# EAGLE board CT_schematic (EAGLE 7.6.0)

Size 100 x 80 mm. Coordinates in mm from the lower left corner, seen from the top.
Outline: 0,0 100,0 100,80 0,80 0,0
Copper layers (1*16): Top 0.035mm / dielectric 1.5mm / Bottom 0.035mm
Design rules "default": minimum track width 10mil, minimum drill 24mil, track to track 8mil, track to pad 8mil, pad to pad 8mil, via to via 8mil, smd to smd 8mil, copper to edge 40mil, drill to drill 8mil, minimum pad ring 10mil, minimum via ring 8mil, stop-mask expansion 4mil, vias tented up to drill 0mil, thermal gap 10mil

## Footprints (pad centres in the part's own frame; a part is rotated, then mirrored left to right if it is on the bottom)
C0603 = smd 0.8 x 0.8: 1 -0.762,0; 2 0.762,0
C0402 = smd 0.5 x 0.5: 1 -0.508,0; 2 0.508,0
C1210 = smd 1.2 x 2.5: 1 -1.524,0; 2 1.524,0
C0805 = smd 1.2 x 1.3: 1 -1.016,0; 2 1.016,0
2220 = smd 1.85 x 5.5: 1 -2.55,0; 2 2.55,0
R0603 = smd 0.8 x 0.8: 1 -0.762,0; 2 0.762,0
EXV-9H = smd 3.505 x 1.676: 1 -2.857,0; 2 2.857,0
L0603 = smd 0.8 x 0.8: 1 -0.762,0; 2 0.762,0
DR1040 = smd 1.6 x 3.2: 1 -4.458,0; 2 4.458,0
PJ-037B_PACKAGE = drill 3.7 square: 1 12,0 | drill 3.2 square: 2 6,0
TFBGA216 = smd 0.4 x 0.4: A1 -5.6,5.6; A2 -4.8,5.6; A3 -4,5.6; A4 -3.2,5.6; A5 -2.4,5.6; A6 -1.6,5.6; A7 -0.8,5.6; A8 0,5.6; A9 0.8,5.6; A10 1.6,5.6; A11 2.4,5.6; A12 3.2,5.6; A13 4,5.6; A14 4.8,5.6; A15 5.6,5.6; B1 -5.6,4.8; B2 -4.8,4.8; B3 -4,4.8; B4 -3.2,4.8; B5 -2.4,4.8; B6 -1.6,4.8; B7 -0.8,4.8; B8 0,4.8; B9 0.8,4.8; B10 1.6,4.8; B11 2.4,4.8; B12 3.2,4.8; B13 4,4.8; B14 4.8,4.8; B15 5.6,4.8; C1 -5.6,4; C2 -4.8,4; C3 -4,4; C4 -3.2,4; C5 -2.4,4; C6 -1.6,4; C7 -0.8,4; C8 0,4; C9 0.8,4; C10 1.6,4; C11 2.4,4; C12 3.2,4; C13 4,4; C14 4.8,4; C15 5.6,4; D1 -5.6,3.2; D2 -4.8,3.2; D3 -4,3.2; D4 -3.2,3.2; D5 -2.4,3.2; D6 -1.6,3.2; D7 -0.8,3.2; D8 0,3.2; D9 0.8,3.2; D10 1.6,3.2; D11 2.4,3.2; D12 3.2,3.2; D13 4,3.2; D14 4.8,3.2; D15 5.6,3.2; E1 -5.6,2.4; E2 -4.8,2.4; E3 -4,2.4; E4 -3.2,2.4; E5 -2.4,2.4; E6 -1.6,2.4; E7 -0.8,2.4; E8 0,2.4; E9 0.8,2.4; E10 1.6,2.4; E11 2.4,2.4; E12 3.2,2.4; E13 4,2.4; E14 4.8,2.4; E15 5.6,2.4; F1 -5.6,1.6; F2 -4.8,1.6; F3 -4,1.6; F4 -3.2,1.6; F5 -2.4,1.6; F6 -1.6,1.6; F7 -0.8,1.6; F8 0,1.6; F9 0.8,1.6; F10 1.6,1.6; F11 2.4,1.6; F12 3.2,1.6; F13 4,1.6; F14 4.8,1.6; F15 5.6,1.6; G1 -5.6,0.8; G2 -4.8,0.8; G3 -4,0.8; G4 -3.2,0.8; G5 -2.4,0.8; G6 -1.6,0.8; G10 1.6,0.8; G11 2.4,0.8; G12 3.2,0.8; G13 4,0.8; G14 4.8,0.8; G15 5.6,0.8; H1 -5.6,0; H2 -4.8,0; H3 -4,0; H4 -3.2,0; H5 -2.4,0; H6 -1.6,0; H10 1.6,0; H11 2.4,0; H12 3.2,0; H13 4,0; H14 4.8,0; H15 5.6,0; J1 -5.6,-0.8; J2 -4.8,-0.8; J3 -4,-0.8; J4 -3.2,-0.8; J5 -2.4,-0.8; J6 -1.6,-0.8; J10 1.6,-0.8; J11 2.4,-0.8; J12 3.2,-0.8; J13 4,-0.8; J14 4.8,-0.8; J15 5.6,-0.8; K1 -5.6,-1.6; K2 -4.8,-1.6; K3 -4,-1.6; K4 -3.2,-1.6; K5 -2.4,-1.6; K6 -1.6,-1.6; K7 -0.8,-1.6; K8 0,-1.6; K9 0.8,-1.6; K10 1.6,-1.6; K11 2.4,-1.6; K12 3.2,-1.6; K13 4,-1.6; K14 4.8,-1.6; K15 5.6,-1.6; L1 -5.6,-2.4; L2 -4.8,-2.4; L3 -4,-2.4; L4 -3.2,-2.4; L5 -2.4,-2.4; L6 -1.6,-2.4; L7 -0.8,-2.4; L8 0,-2.4; L9 0.8,-2.4; L10 1.6,-2.4; L11 2.4,-2.4; L12 3.2,-2.4; L13 4,-2.4; L14 4.8,-2.4; L15 5.6,-2.4; M1 -5.6,-3.2; M2 -4.8,-3.2; M3 -4,-3.2; M4 -3.2,-3.2; M5 -2.4,-3.2; M6 -1.6,-3.2; M7 -0.8,-3.2; M8 0,-3.2; M9 0.8,-3.2; M10 1.6,-3.2; M11 2.4,-3.2; M12 3.2,-3.2; M13 4,-3.2; M14 4.8,-3.2; M15 5.6,-3.2; N1 -5.6,-4; N2 -4.8,-4; N3 -4,-4; N4 -3.2,-4; N5 -2.4,-4; N6 -1.6,-4; N7 -0.8,-4; N8 0,-4; N9 0.8,-4; N10 1.6,-4; N11 2.4,-4; N12 3.2,-4; N13 4,-4; N14 4.8,-4; N15 5.6,-4; P1 -5.6,-4.8; P2 -4.8,-4.8; P3 -4,-4.8; P4 -3.2,-4.8; P5 -2.4,-4.8; P6 -1.6,-4.8; P7 -0.8,-4.8; P8 0,-4.8; P9 0.8,-4.8; P10 1.6,-4.8; P11 2.4,-4.8; P12 3.2,-4.8; P13 4,-4.8; P14 4.8,-4.8; P15 5.6,-4.8; R1 -5.6,-5.6; R2 -4.8,-5.6; R3 -4,-5.6; R4 -3.2,-5.6; R5 -2.4,-5.6; R6 -1.6,-5.6; R7 -0.8,-5.6; R8 0,-5.6; R9 0.8,-5.6; R10 1.6,-5.6; R11 2.4,-5.6; R12 3.2,-5.6; R13 4,-5.6; R14 4.8,-5.6; R15 5.6,-5.6
SOT-23-6 = smd 1.1 x 0.6: 1 -1.4,0.95; 2 -1.4,0; 3 -1.4,-0.95; 4 1.4,-0.95; 5 1.4,0; 6 1.4,0.95
SOIC-8 = smd 1.6 x 0.6: 1 -2.7,1.905 | smd 1.55 x 0.6: 2 -2.7,0.635; 3 -2.7,-0.635; 4 -2.7,-1.905; 5 2.7,-1.905; 6 2.7,-0.635; 7 2.7,0.635; 8 2.7,1.905
SAMTEC_FTSH-105-01-L-DV-K = smd 0.762 x 2.794: 1 -2.54,-2.032; 2 -2.54,2.032; 3 -1.27,-2.032; 4 -1.27,2.032; 5 0,-2.032; 6 0,2.032; 7 1.27,-2.032; 8 1.27,2.032; 9 2.54,-2.032; 10 2.54,2.032
182-009-MALE = drill 1.194 pad 1.524 octagon: 1 -5.537,10.923; 2 -2.769,10.923; 3 0,10.923; 4 2.769,10.923; 5 5.537,10.923; 6 -4.153,8.08; 7 -1.384,8.08; 8 1.384,8.08; 9 4.153,8.08 | hole 3.048: -12.446,9.501; 12.446,9.501
MICRO_USB_AB = smd 0.4 x 1.35: 1 1.3,0.26; 2 0.65,0.26; 3 0,0.26; 4 -0.65,0.26; 5 -1.3,0.26 | drill 0.6 pad 0.95 long: 6 4.175,-2.54; 7 -4.175,-2.54 | drill 0.7 pad 1.1 long: 8 -2.225,0.46; 9 2.225,0.46
SOT143B = smd 1 x 0.7: 1 -0.75,-1 | smd 0.6 x 0.7: 2 0.95,-1; 3 0.95,1; 4 -0.95,1
USB-A-H = drill 0.914: 1 2.718,3.493; 2 2.718,1.003; 3 2.718,-1.003; 4 2.718,-3.493 | drill 2.311: 5 0,-6.566; 6 0,6.566
ABS07-32.768KHZ-7-T = smd 1.1 x 2.4: 1 -2.5,0; 2 0,0
ASFL1 = smd 1.7 x 1.5: 1 -1.27,-1.1; 2 1.27,-1.1; 3 1.27,1.1; 4 -1.27,1.1
WSON-8 = smd 0.3 x 0.6: 1 -0.75,0; 2 0.05,0; 3 0.85,0; 4 1.65,0; 5 1.65,3.8; 6 0.85,3.8; 7 0.05,3.8; 8 -0.75,3.8 | smd 3 x 2.6: PAD 0.45,1.9
QFN-16_EP = smd 0.805 x 0.3: 1 -1.452,0.75; 2 -1.452,0.25; 3 -1.452,-0.25; 4 -1.452,-0.75; 9 1.452,-0.75; 10 1.452,-0.25; 11 1.452,0.25; 12 1.452,0.75 | smd 0.3 x 0.805: 5 -0.75,-1.452; 6 -0.25,-1.452; 7 0.25,-1.452; 8 0.75,-1.452; 13 0.75,1.452; 14 0.25,1.452; 15 -0.25,1.452; 16 -0.75,1.452 | smd 1.55 x 1.55: 17 0,0
QFN-38_UHF = smd 0.75 x 0.3: 1 -2.4,2.75; 2 -2.4,2.25; 3 -2.4,1.75; 4 -2.4,1.25; 6 -2.4,0.25; 7 -2.4,-0.25; 8 -2.4,-0.75; 9 -2.4,-1.25; 10 -2.4,-1.75; 11 -2.4,-2.25; 12 -2.4,-2.75; 20 2.4,-2.75; 21 2.4,-2.25; 22 2.4,-1.75; 23 2.4,-1.25; 24 2.4,-0.75; 25 2.4,-0.25; 26 2.4,0.25; 27 2.4,0.75; 28 2.4,1.25; 29 2.4,1.75; 30 2.4,2.25; 31 2.4,2.75 | smd 0.758 x 0.3: 5 -2.4,0.75 | smd 0.3 x 0.75: 13 -1.5,-3.4; 14 -1,-3.4; 15 -0.5,-3.4; 16 0,-3.4; 17 0.5,-3.4; 18 1,-3.4; 19 1.5,-3.4; 32 1.5,3.4; 33 1,3.4; 34 0.5,3.4; 35 0,3.4; 36 -0.5,3.4; 37 -1,3.4; 38 -1.5,3.4 | smd 3.2 x 5.2: 39 0,0
IRF8306MTRPBF = smd 0.9 x 1.85: 1 0,0; 2 0,-2.35; 6 6.4,0; 7 6.4,-2.35 | smd 0.75 x 0.75: 3 1.75,-1.175 | smd 1.45 x 0.87: 4 3.5,-0.565; 5 3.5,-1.785
SW_4-1437565-2 = smd 1.4 x 2.1: 1 -2.23,4.55; 2 -2.23,-4.55; 3 2.23,4.55; 4 2.23,-4.55
LGM67K-G1J2-24-Z = smd 0.8 x 1.4: A -2,0; C 0,0
NC7SZ125M5X = smd 1.3 x 0.7: 1 -1.3,0.95; 2 -1.3,0; 3 -1.3,-0.95; 4 1.3,-0.95; 5 1.3,0.95

## Placement (x,y rotation side)
C1  1e-06  [C0603]  -92.71,80.01 0 top  (outside the outline)
C2  1e-07  [C0603]  -15.24,85.09 0 top  (outside the outline)
C3  1e-07  [C0603]  -19.05,85.09 0 top  (outside the outline)
C4  1e-07  [C0603]  -22.86,85.09 0 top  (outside the outline)
C5  1e-07  [C0603]  -26.67,85.09 0 top  (outside the outline)
C6  1e-07  [C0603]  -30.48,85.09 0 top  (outside the outline)
C7  1e-07  [C0603]  -34.29,85.09 0 top  (outside the outline)
C8  1e-07  [C0603]  -38.1,85.09 0 top  (outside the outline)
C9  1e-07  [C0603]  -41.91,85.09 0 top  (outside the outline)
C10  1e-07  [C0603]  -45.72,85.09 0 top  (outside the outline)
C11  1e-07  [C0603]  -49.53,85.09 0 top  (outside the outline)
C12  1e-07  [C0603]  -53.34,85.09 0 top  (outside the outline)
C13  1e-07  [C0603]  -57.15,85.09 0 top  (outside the outline)
C14  1e-07  [C0603]  -60.96,85.09 0 top  (outside the outline)
C15  1e-07  [C0603]  -64.77,85.09 0 top  (outside the outline)
C16  1e-07  [C0603]  -68.58,85.09 0 top  (outside the outline)
C17  1e-07  [C0603]  -72.39,85.09 0 top  (outside the outline)
C18  1e-07  [C0603]  -76.2,85.09 0 top  (outside the outline)
C19  1e-07  [C0603]  -80.01,85.09 0 top  (outside the outline)
C20  1e-07  [C0603]  -83.82,85.09 0 top  (outside the outline)
C21  1e-07  [C0603]  -87.63,85.09 0 top  (outside the outline)
C22  4.7e-06  [C0603]  -85.09,80.01 0 top  (outside the outline)
C23  1e-08  [C0603]  -91.44,85.09 0 top  (outside the outline)
C24  1e-06  [C0603]  -15.24,90.17 0 top  (outside the outline)
C25  1e-07  [C0603]  -19.05,90.17 0 top  (outside the outline)
C26  1e-07  [C0603]  -22.86,90.17 0 top  (outside the outline)
C27  1e-07  [C0603]  -26.67,90.17 0 top  (outside the outline)
C28  1e-11  [C0402]  -87.63,90.17 0 top  (outside the outline)
C29  1e-11  [C0402]  -91.44,90.17 0 top  (outside the outline)
C30  1e-08  [C0402]  -15.24,95.25 0 top  (outside the outline)
C31  1e-07  [C0402]  -19.05,95.25 0 top  (outside the outline)
C32  1e-07  [C0402]  -22.86,95.25 0 top  (outside the outline)
C33  1e-08  [C0402]  -26.67,95.25 0 top  (outside the outline)
C34  1e-08  [C0402]  -30.48,95.25 0 top  (outside the outline)
C35  1e-05  [C1210]  -80.01,62.23 0 top  (outside the outline)
C36  1e-05  [C0805]  -50.8,68.58 0 top  (outside the outline)
C37  1e-08  [C0402]  -34.29,95.25 0 top  (outside the outline)
C38  1e-05  [C1210]  -86.36,62.23 0 top  (outside the outline)
C39  1e-05  [C1210]  -16.51,69.85 0 top  (outside the outline)
C40  1e-05  [C0805]  -55.88,68.58 0 top  (outside the outline)
C41  1e-06  [C0603]  -30.48,90.17 0 top  (outside the outline)
C42  1e-07  [C0402]  -38.1,95.25 0 top  (outside the outline)
C43  6.8e-05  [2220]  -88.9,41.91 0 top  (outside the outline)
C44  1e-08  [C0402]  -41.91,95.25 0 top  (outside the outline)
C45  1e-05  [C1210]  -22.86,69.85 0 top  (outside the outline)
C46  1e-05  [C0805]  -60.96,68.58 0 top  (outside the outline)
C47  1e-07  [C0402]  -45.72,95.25 0 top  (outside the outline)
C48  2.2e-06  [C0603]  -88.9,80.01 0 top  (outside the outline)
C49  2.45e-08  [R0603]  -40.64,74.93 0 top  (outside the outline)
C50  2.8258362168397e-09  [R0603]  -71.12,68.58 0 top  (outside the outline)
C51  7.105e-09  [R0603]  -83.82,68.58 0 top  (outside the outline)
C52  0.0001  [EXV-9H]  -26.67,62.23 0 top  (outside the outline)
C53  0.0001  [EXV-9H]  -38.1,62.23 0 top  (outside the outline)
C54  1e-08  [C0402]  -49.53,95.25 0 top  (outside the outline)
C55  1e-08  [C0402]  -53.34,95.25 0 top  (outside the outline)
F1  240.0  [L0603]  -34.29,90.17 0 top  (outside the outline)
I1  7e-06  [DR1040]  -19.05,43.18 0 top  (outside the outline)
J1  PJ-037B  [PJ-037B_PACKAGE]  -57.15,29.21 0 top  (outside the outline)
R2  1000.0  [R0603]  -38.1,90.17 0 top  (outside the outline)
R7  4700.0  [R0603]  -41.91,90.17 0 top  (outside the outline)
R8  47000.0  [R0603]  -45.72,74.93 0 top  (outside the outline)
R9  47000.0  [R0603]  -50.8,74.93 0 top  (outside the outline)
R10  10000.0  [R0603]  -55.88,74.93 0 top  (outside the outline)
R11  10000.0  [R0603]  -60.96,74.93 0 top  (outside the outline)
R12  10000.0  [R0603]  -66.04,74.93 0 top  (outside the outline)
R13  10000.0  [R0603]  -71.12,74.93 0 top  (outside the outline)
R14  10000.0  [R0603]  -76.2,74.93 0 top  (outside the outline)
R15  10000.0  [R0603]  -81.28,74.93 0 top  (outside the outline)
R16  1270.0  [R0603]  -45.72,90.17 0 top  (outside the outline)
R17  10000.0  [R0603]  -86.36,74.93 0 top  (outside the outline)
R18  10000.0  [R0603]  -91.44,74.93 0 top  (outside the outline)
R19  10000.0  [R0603]  -15.24,80.01 0 top  (outside the outline)
R20  10000.0  [R0603]  -20.32,80.01 0 top  (outside the outline)
R21  10000.0  [R0603]  -25.4,80.01 0 top  (outside the outline)
R22  10000.0  [R0603]  -30.48,80.01 0 top  (outside the outline)
R23  5.0  [R0603]  -49.53,90.17 0 top  (outside the outline)
R24  120.0  [R0603]  -53.34,90.17 0 top  (outside the outline)
R25  470000.0  [R0603]  -88.9,68.58 0 top  (outside the outline)
R26  100000.0  [R0603]  -15.24,74.93 0 top  (outside the outline)
R27  200.0  [R0603]  -57.15,90.17 0 top  (outside the outline)
R28  1000.0  [R0603]  -60.96,90.17 0 top  (outside the outline)
R29  100000.0  [R0603]  -20.32,74.93 0 top  (outside the outline)
R30  2231.0  [R0603]  -64.77,90.17 0 top  (outside the outline)
R31  1000.0  [R0603]  -68.58,90.17 0 top  (outside the outline)
R32  20000.0  [R0603]  -35.56,80.01 0 top  (outside the outline)
R33  150000.0  [R0603]  -25.4,74.93 0 top  (outside the outline)
R34  300000.0  [R0603]  -30.48,74.93 0 top  (outside the outline)
R35  100000.0  [R0603]  -35.56,74.93 0 top  (outside the outline)
R36  200.0  [R0603]  -72.39,90.17 0 top  (outside the outline)
R37  1000.0  [R0603]  -76.2,90.17 0 top  (outside the outline)
R38  10000.0  [R0603]  -40.64,80.01 0 top  (outside the outline)
R39  75000.0  [R0603]  -45.72,80.01 0 top  (outside the outline)
R40  10000.0  [R0603]  -50.8,80.01 0 top  (outside the outline)
R41  10000.0  [R0603]  -55.88,80.01 0 top  (outside the outline)
R42  95300.0  [R0603]  -60.96,80.01 0 top  (outside the outline)
R43  95300.0  [R0603]  -66.04,80.01 0 top  (outside the outline)
R44  10000.0  [R0603]  -71.12,80.01 0 top  (outside the outline)
R45  10000.0  [R0603]  -76.2,80.01 0 top  (outside the outline)
R46  10000.0  [R0603]  -81.28,80.01 0 top  (outside the outline)
R47  113145.45454545  [R0603]  -78.74,68.58 0 top  (outside the outline)
U1  STM32F479NIH6  [TFBGA216]  -63.5,8.89 0 top  (outside the outline)
U2  MAX4995AAUT+T  [SOT-23-6]  -27.94,68.58 0 top  (outside the outline)
U3  MAX4995AAUT+T  [SOT-23-6]  -33.02,68.58 0 top  (outside the outline)
U4  AT25160B-SSHL-T  [SOIC-8]  -36.83,41.91 0 top  (outside the outline)
U5  FTSH-105-01-L-DV-K  [SAMTEC_FTSH-105-01-L-DV-K]  -35.56,30.48 0 top  (outside the outline)
U6  SN65HVD230D  [SOIC-8]  -50.8,41.91 0 top  (outside the outline)
U7  182-009-113R531  [182-009-MALE]  -36.83,6.35 0 top  (outside the outline)
U8  47590-0001  [MICRO_USB_AB]  -66.04,30.48 0 top  (outside the outline)
U9  prtr5v0u2ax  [SOT143B]  -66.04,95.25 0 top  (outside the outline)
U10  61400416021  [USB-A-H]  -77.47,8.89 0 top  (outside the outline)
U11  prtr5v0u2ax  [SOT143B]  -78.74,95.25 0 top  (outside the outline)
U12  ABS07-32.768KHZ-7-T  [ABS07-32.768KHZ-7-T]  -59.69,62.23 0 top  (outside the outline)
U13  ASFL1-25MHZ-NCS  [ASFL1]  -87.63,53.34 0 top  (outside the outline)
U14  LP3878SDX-ADJ/NOPB  [WSON-8]  -30.48,52.07 0 top  (outside the outline)
U15  LP3878SDX-ADJ/NOPB  [WSON-8]  -50.8,52.07 0 top  (outside the outline)
U16  LTC3601EUD#PBF  [QFN-16_EP]  -81.28,90.17 0 top  (outside the outline)
U17  LP3878SDX-ADJ/NOPB  [WSON-8]  -71.12,52.07 0 top  (outside the outline)
U18  LTC2928CUHF#PBF  [QFN-38_UHF]  -16.51,62.23 0 top  (outside the outline)
U19  IRF8306MTRPbF  [IRF8306MTRPBF]  -68.58,43.18 0 top  (outside the outline)
U20  IRF8306MTRPbF  [IRF8306MTRPBF]  -83.82,43.18 0 top  (outside the outline)
U21  4-1437565-2  [SW_4-1437565-2]  -86.36,27.94 0 top  (outside the outline)
U22  Q65110A2395  [LGM67K-G1J2-24-Z]  -68.58,62.23 0 top  (outside the outline)
U23  nc7sz125m5x  [NC7SZ125M5X]  -38.1,68.58 0 top  (outside the outline)
U24  nc7sz125m5x  [NC7SZ125M5X]  -44.45,68.58 0 top  (outside the outline)

## Library data of the parts
C1-C55 F1 I1 J1 R2 R7-R47 U1-U24 = circuit_tree

## Nets
CLK_CRYSTAL_U1_E1: C28.1 U1.E1 U12.1
CLK_CRYSTAL_U1_F1: C29.1 U1.F1 U12.2
CLK_U1_G1: U1.G1 U13.3
GND: C1.2 C2.2 C3.2 C4.2 C5.2 C6.2 C7.2 C8.2 C9.2 C10.2 C11.2 C12.2 C13.2 C14.2 C15.2 C16.2 C17.2 C18.2 C19.2 C20.2 C21.2 C22.2 C23.2 C24.2 C25.2 C26.2 C27.2 C28.2 C29.2 C30.2 C31.2 C32.2 C33.2 C34.2 C35.2 C36.2 C37.2 C38.2 C39.2 C40.2 C41.2 C43.1 C43.2 C44.2 C45.2 C46.2 C47.2 C48.2 C49.2 C50.2 C51.2 C52.2 C53.2 C54.2 C55.2 J1.2 R2.2 R8.2 R9.2 R15.2 R16.2 R23.2 R25.2 R28.2 R31.2 R32.2 R34.2 R37.2 R39.2 R42.2 R43.2 R44.2 R45.2 R46.2 U1.F2 U1.F6 U1.F7 U1.F8 U1.F9 U1.F10 U1.G6 U1.G10 U1.G12 U1.H6 U1.H10 U1.J6 U1.J10 U1.K6 U1.K7 U1.K8 U1.K9 U1.K10 U1.L6 U1.L13 U1.M1 U1.N1 U2.2 U3.2 U4.4 U5.3 U5.5 U6.2 U7.5 U8.5 U8.6 U8.7 U8.8 U8.9 U9.1 U10.4 U10.5 U10.6 U11.1 U13.2 U14.3 U14.PAD U15.3 U15.PAD U16.1 U16.9 U16.17 U17.3 U17.PAD U18.8 U18.9 U18.10 U18.12 U18.13 U18.24 U18.25 U18.30 U18.32 U18.39 U22.C U23.2 U23.3 U24.1 U24.3
NET_U1_E5: R10.1 U1.E5
NET_U1_E6: R11.1 U1.E6
NET_U1_E11: C27.1 U1.E11
NET_U1_G13: U1.G13
NET_U1_J1: R7.1 U1.J1 U24.4
NET_U1_K12: U1.K12
NET_U1_L5: R13.1 U1.L5
NET_U1_L13: R16.1 U1.L13
NET_U1_M5: R12.1 U1.M5
NET_U1_R1: C23.1 C24.1 F1.1 U1.P1 U1.R1
NET_U1_R12: U22.A
NET_U1_R13: U21.3 U21.4
NET_U2_3: R8.1 U2.3
NET_U3_3: R9.1 U3.3
NET_U4_3: R17.1 U4.3
NET_U4_7: R19.1 U4.7
NET_U5_9: R23.1 U5.9
NET_U6_6: R24.2 U6.6
NET_U6_8: R25.1 U6.8
NET_U7_2: R24.2 U6.6 U7.2
NET_U7_3: R24.1 U6.7 U7.3
NET_U14_1: C34.1 U14.1
NET_U14_6: R27.2 R28.1 U14.6
NET_U14_8: R26.1 U14.8
NET_U15_1: C37.1 U15.1
NET_U15_6: R30.2 R31.1 U15.6
NET_U15_8: R29.1 U15.8
NET_U16_3: C42.2 I1.1 U16.3 U16.4
NET_U16_6: C42.1 U16.6
NET_U16_7: C41.1 U16.7 U16.12
NET_U16_10: R34.1 U16.10
NET_U16_11: R32.1 R33.1 U16.11
NET_U16_14: U16.14
NET_U16_ATNET_3: I1.2 R33.2
NET_U17_1: C44.1 U17.1
NET_U17_6: R36.2 R37.1 U17.6
NET_U17_8: R35.1 U17.8
NET_U18_3: R45.1 U18.3
NET_U18_6: R42.1 U18.6
NET_U18_7: R43.1 U18.7
NET_U18_16: R44.1 R47.1 U18.16
NET_U18_18: R41.1 U18.18
NET_U18_19: R40.1 U18.19 U18.20
NET_U18_21: R38.1 R39.1 U18.21 U23.4 U24.2
NET_U18_22: C47.1 R38.2 R40.2 R41.2 U18.11 U18.22
NET_U18_26: C50.1 U18.26
NET_U18_27: C49.1 U18.27
NET_U18_28: C51.1 U18.28
NET_U18_38: R46.1 U18.38
NET_U19_3: U18.2 U19.3
NET_U20_3: U18.37 U20.3
NET_U21_1: R2.1 U21.1 U21.2
PROC_CAN1_RX: U1.A7 U6.4
PROC_CAN1_TX: U1.B4 U6.1
PROC_GPIO_TO_U1_USB_FAULT: R14.1 U1.A2 U2.6
PROC_GPIO_TO_U1_USB_FAULT2: U1.A4 U3.6
PROC_GPIO_TO_U1_VBUS_EN: R15.1 U1.A1 U2.4
PROC_GPIO_TO_U1_VBUS_EN2: U1.A3 U3.4
PROC_SPI1_MISO: U1.A9 U4.2
PROC_SPI1_MOSI: U1.A8 U4.5
PROC_SPI1_NSS: R18.1 U1.A13 U4.1
PROC_SPI1_SCK: U1.P4 U4.6
PROC_SYS_JTCK_SWCLK: R21.1 U1.A14 U5.4
PROC_SYS_JTDO_SWO: U1.A10 U5.6
PROC_SYS_JTMS_SWDIO: R22.1 U1.A15 U5.2
PROC_USB_OTG_FS_DM: U1.C15 U8.2 U9.3
PROC_USB_OTG_FS_DP: U1.B15 U8.3 U9.2
PROC_USB_OTG_FS_ID: U1.D15 U8.4
PROC_USB_OTG_FS_VBUS: U1.E15 U2.1 U8.1 U9.4
PROC_USB_OTG_HS_DM: U1.R14 U10.2 U11.3
PROC_USB_OTG_HS_DP: U1.R15 U10.3 U11.2
PROC_USB_OTG_HS_VBUS: U1.K14 U3.1 U10.1 U11.4
RST_OUT_U5_JTAG_RST_B: R20.1 U5.10 U23.1
VCC_13V8: C48.1 C52.1 C53.1 J1.1 R47.2 U18.23 U19.1 U19.2 U19.6 U19.7 U20.1 U20.2 U20.6 U20.7
VCC_S1_13V8: C35.1 C38.1 C40.1 R26.2 R29.2 U14.4 U15.4 U16.15 U16.16 U19.4 U19.5
VCC_S2_13V8: C45.1 R35.2 U17.4 U20.4 U20.5
VCC_TIER1_1V2: C26.1 C36.1 R27.1 U1.L11 U14.5
VCC_TIER1_3V3: C1.1 C2.1 C3.1 C4.1 C5.1 C6.1 C7.1 C8.1 C9.1 C10.1 C11.1 C12.1 C13.1 C14.1 C15.1 C16.1 C17.1 C18.1 C19.1 C20.1 C21.1 C22.1 C25.1 C30.1 C31.1 C32.1 C33.1 C39.1 C54.1 C55.1 F1.2 R7.2 R10.2 R11.2 R12.2 R13.2 R14.2 R17.2 R18.2 R19.2 R20.2 R21.2 R22.2 R30.1 U1.C1 U1.E7 U1.E8 U1.E9 U1.E10 U1.F4 U1.F5 U1.F11 U1.G5 U1.G11 U1.H5 U1.H11 U1.J5 U1.J11 U1.K5 U1.K11 U1.L7 U1.L8 U1.L9 U1.L10 U4.8 U5.1 U6.3 U13.4 U15.5 U23.5 U24.5
VCC_TIER1_5V0: C43.2 I1.2 R33.2 U2.5 U3.5 U16.8
VCC_TIER2_1V2: C46.1 R36.1 U17.5

## Tracks (layer width: path | path; a pad name or v marks a point on that pad's centre or on a via)
CLK_CRYSTAL_U1_E1  (2 unrouted)
CLK_CRYSTAL_U1_F1  (2 unrouted)
CLK_U1_G1  (1 unrouted)
GND  (137 unrouted)
NET_U1_E5  (1 unrouted)
NET_U1_E6  (1 unrouted)
NET_U1_E11  (1 unrouted)
NET_U1_J1  (2 unrouted)
NET_U1_L5  (1 unrouted)
NET_U1_L13  (1 unrouted)
NET_U1_M5  (1 unrouted)
NET_U1_R1  (4 unrouted)
NET_U1_R13  (1 unrouted)
NET_U2_3  (1 unrouted)
NET_U3_3  (1 unrouted)
NET_U4_3  (1 unrouted)
NET_U4_7  (1 unrouted)
NET_U5_9  (1 unrouted)
NET_U6_6  (1 unrouted)
NET_U6_8  (1 unrouted)
NET_U7_2  (2 unrouted)
NET_U7_3  (2 unrouted)
NET_U14_1  (1 unrouted)
NET_U14_6  (2 unrouted)
NET_U14_8  (1 unrouted)
NET_U15_1  (1 unrouted)
NET_U15_6  (2 unrouted)
NET_U15_8  (1 unrouted)
NET_U16_3  (3 unrouted)
NET_U16_6  (1 unrouted)
NET_U16_7  (2 unrouted)
NET_U16_10  (1 unrouted)
NET_U16_11  (2 unrouted)
NET_U16_ATNET_3  (1 unrouted)
NET_U17_1  (1 unrouted)
NET_U17_6  (2 unrouted)
NET_U17_8  (1 unrouted)
NET_U18_3  (1 unrouted)
NET_U18_6  (1 unrouted)
NET_U18_7  (1 unrouted)
NET_U18_16  (2 unrouted)
NET_U18_18  (1 unrouted)
NET_U18_19  (2 unrouted)
NET_U18_21  (4 unrouted)
NET_U18_22  (5 unrouted)
NET_U18_26  (1 unrouted)
NET_U18_27  (1 unrouted)
NET_U18_28  (1 unrouted)
NET_U18_38  (1 unrouted)
NET_U19_3  (1 unrouted)
NET_U20_3  (1 unrouted)
NET_U21_1  (2 unrouted)
PROC_CAN1_RX  (1 unrouted)
PROC_CAN1_TX  (1 unrouted)
PROC_GPIO_TO_U1_USB_FAULT  (2 unrouted)
PROC_GPIO_TO_U1_USB_FAULT2  (1 unrouted)
PROC_GPIO_TO_U1_VBUS_EN  (2 unrouted)
PROC_GPIO_TO_U1_VBUS_EN2  (1 unrouted)
PROC_SPI1_MISO  (1 unrouted)
PROC_SPI1_MOSI  (1 unrouted)
PROC_SPI1_NSS  (2 unrouted)
PROC_SPI1_SCK  (1 unrouted)
PROC_SYS_JTCK_SWCLK  (2 unrouted)
PROC_SYS_JTDO_SWO  (1 unrouted)
PROC_SYS_JTMS_SWDIO  (2 unrouted)
PROC_USB_OTG_FS_DM  (2 unrouted)
PROC_USB_OTG_FS_DP  (2 unrouted)
PROC_USB_OTG_FS_ID  (1 unrouted)
PROC_USB_OTG_FS_VBUS  (3 unrouted)
PROC_USB_OTG_HS_DM  (2 unrouted)
PROC_USB_OTG_HS_DP  (2 unrouted)
PROC_USB_OTG_HS_VBUS  (3 unrouted)
RST_OUT_U5_JTAG_RST_B  (2 unrouted)
VCC_13V8  (13 unrouted)
VCC_S1_13V8  (10 unrouted)
VCC_S2_13V8  (4 unrouted)
VCC_TIER1_1V2  (4 unrouted)
VCC_TIER1_3V3  (70 unrouted)
VCC_TIER1_5V0  (5 unrouted)
VCC_TIER2_1V2  (2 unrouted)